# EAGLE board interface_a (EAGLE 6.3)
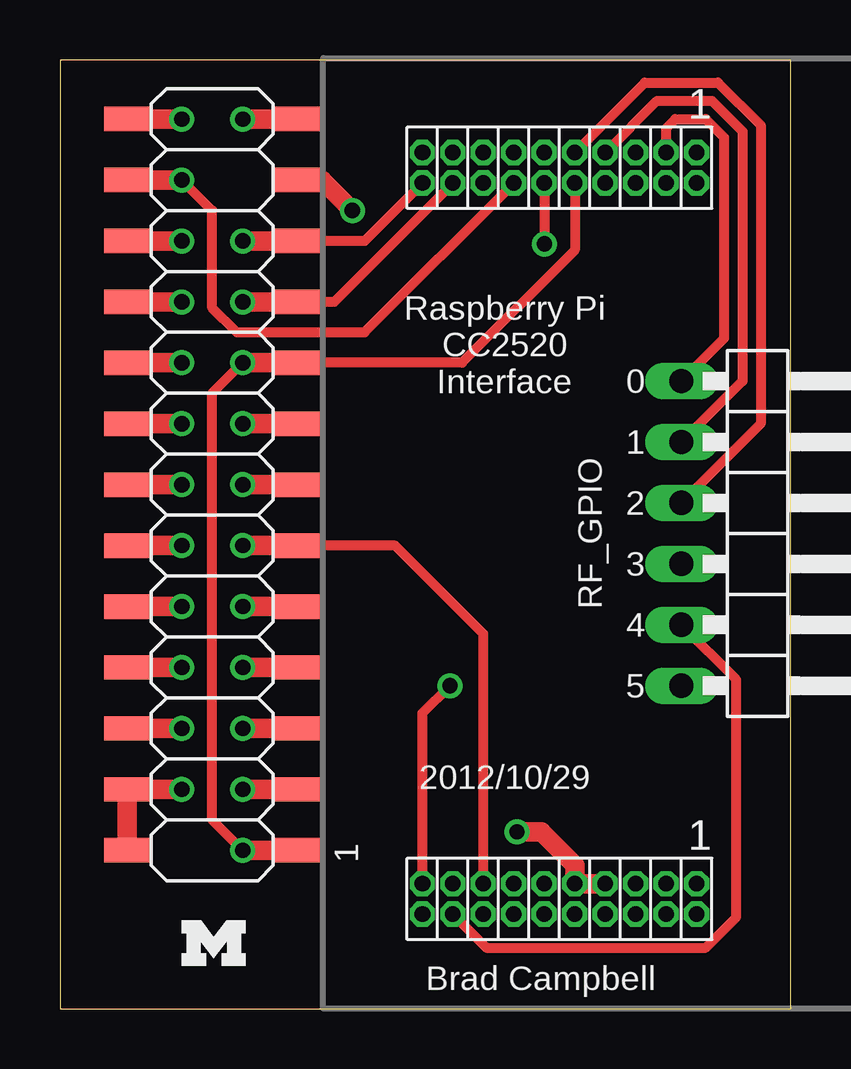
[diagram p0: board, top side]
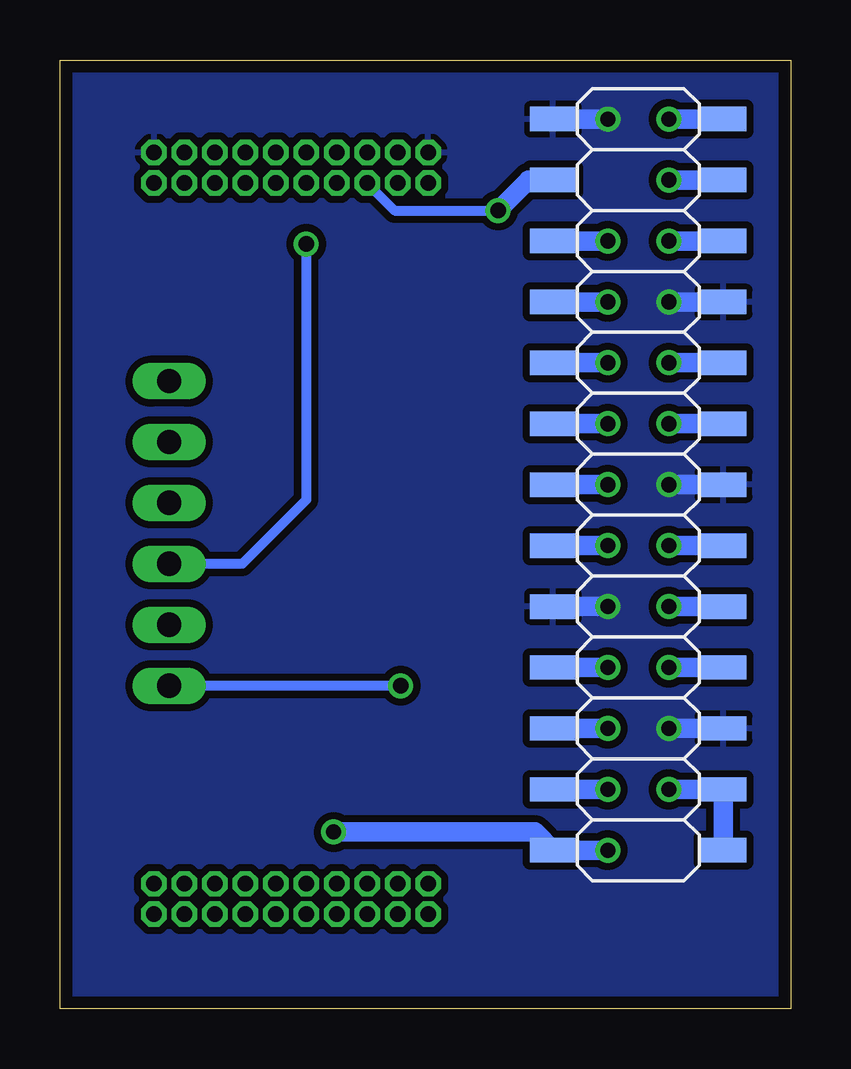
[diagram p1: board, bottom side, seen from below]

Size 30.46 x 39.55 mm. Coordinates in mm from the lower left corner, seen from the top.
Outline: 0,0 30.46,0 30.46,39.55 0,39.55 0,0
Copper layers (1*16): Top 0.0178mm / dielectric 59mil / Bottom 0.0178mm
Design rules "default *": minimum track width 6mil, minimum drill 14mil, track to track 6mil, track to pad 6mil, pad to pad 6mil, via to via 6mil, smd to smd 6mil, copper to edge 20mil, drill to drill 16mil, minimum pad ring 8mil, minimum via ring 8mil, stop-mask expansion 3mil, vias tented up to drill 25mil, thermal gap 10mil

## Footprints (pad centres in the part's own frame; a part is rotated, then mirrored left to right if it is on the bottom)
TI_CC_EVM = drill 0.65 octagon: P1_1 5.715,15.875; P1_2 5.715,14.605; P1_3 4.445,15.875; P1_4 4.445,14.605; P1_5 3.175,15.875; P1_6 3.175,14.605; P1_7 1.905,15.875; P1_8 1.905,14.605; P1_9 0.635,15.875; P1_10 0.635,14.605; P1_11 -0.635,15.875; P1_12 -0.635,14.605; P1_13 -1.905,15.875; P1_14 -1.905,14.605; P1_15 -3.175,15.875; P1_16 -3.175,14.605; P1_17 -4.445,15.875; P1_18 -4.445,14.605; P1_19 -5.715,15.875; P1_20 -5.715,14.605; P2_1 5.715,-14.605; P2_2 5.715,-15.875; P2_3 4.445,-14.605; P2_4 4.445,-15.875; P2_5 3.175,-14.605; P2_6 3.175,-15.875; P2_7 1.905,-14.605; P2_8 1.905,-15.875; P2_9 0.635,-14.605; P2_10 0.635,-15.875; P2_11 -0.635,-14.605; P2_12 -0.635,-15.875; P2_13 -1.905,-14.605; P2_14 -1.905,-15.875; P2_15 -3.175,-14.605; P2_16 -3.175,-15.875; P2_17 -4.445,-14.605; P2_18 -4.445,-15.875; P2_19 -5.715,-14.605; P2_20 -5.715,-15.875
2X13/SMD = smd 1.016 x 1.905: 1 -15.24,-3.556; 2 -15.24,3.556; 3 -12.7,-3.556; 4 -12.7,3.556; 5 -10.16,-3.556; 6 -10.16,3.556; 7 -7.62,-3.556; 8 -7.62,3.556; 9 -5.08,-3.556; 10 -5.08,3.556; 11 -2.54,-3.556; 12 -2.54,3.556; 13 0,-3.556; 14 0,3.556; 15 2.54,-3.556; 16 2.54,3.556; 17 5.08,-3.556; 18 5.08,3.556; 19 7.62,-3.556; 20 7.62,3.556; 21 10.16,-3.556; 22 10.16,3.556; 23 12.7,-3.556; 24 12.7,3.556; 25 15.24,-3.556; 26 15.24,3.556
1X06/90 = drill 1.016 long: 1 -6.35,-3.81; 2 -3.81,-3.81; 3 -1.27,-3.81; 4 1.27,-3.81; 5 3.81,-3.81; 6 6.35,-3.81

## Placement (x,y rotation side)
EVM1  CC2520EM  [TI_CC_EVM]  20.83,19.81 0 top
J1  PINHD-2X12/SMD  [2X13/SMD]  6.35,21.84 90 bottom
J2  PINHD-2X12/SMD  [2X13/SMD]  6.35,21.84 90 top
JP1  [1X06/90]  29.72,19.81 270 top
U$1  UMICH_SOLID_SMALL  [UMICH_SOLID_75MIL]  5.08,1.78 0 top

## Library data of the parts
EVM1 = brouter
J1 J2 = headers
JP1 = pinhead
U$1 = logos

## Nets
3.3V: EVM1.P1_10 EVM1.P2_7 EVM1.P2_9 J1.2 J1.18 J2.1 J2.17
5V: J1.1 J1.3 J2.2 J2.4
CE0: EVM1.P1_14 J1.23 J2.24
CE1: J1.25 J2.26
GND: EVM1.P1_1 EVM1.P1_19 J1.5 J1.10 J1.13 J1.19 J1.26 J2.6 J2.9 J2.14 J2.20 J2.25
GPIO4: J1.8 J2.7
GPIO17: EVM1.P2_15 J1.12 J2.11
GPIO18: J1.11 J2.12
GPIO22: J1.16 J2.15
GPIO23: J1.15 J2.16
GPIO24: J1.17 J2.18
GPIO25: J1.21 J2.22
GPIO27: J1.14 J2.13
MISO: EVM1.P1_20 J1.22 J2.21
MOSI: EVM1.P1_18 J1.20 J2.19
RF_GPIO0: EVM1.P1_3 JP1.1
RF_GPIO1: EVM1.P1_7 JP1.2
RF_GPIO2: EVM1.P1_9 JP1.3
RF_GPIO3: EVM1.P1_12 JP1.4
RF_GPIO4: EVM1.P2_18 JP1.5
RF_GPIO5: EVM1.P2_19 JP1.6
SCL: J1.6 J2.5
SCLK: EVM1.P1_16 J1.24 J2.23
SDA: J1.4 J2.3
UART0_RXD: J1.9 J2.10
UART0_TXD: J1.7 J2.8

## Tracks (layer width: path | path; a pad name or v marks a point on that pad's centre or on a via)
3.3V  (via drill 0.64)
  Top 0.406: EVM1.P1_10 21.46,31.62 16.76,26.92 J2.17 | v7.62,6.6 6.35,7.87 6.35,25.65 v7.62,26.92
  Top 0.813: EVM1.P2_7 EVM1.P2_9 21.46,5.97 20.07,7.37 v19.05,7.37 | J2.1 v7.62,6.6 | v7.62,26.92 J2.17
  Bottom 0.813: v7.62,26.92 J2.17 | v7.62,6.6 J2.1 10.67,7.37 v19.05,7.37
5V  (via drill 0.64)
  Top 0.813: J2.2 J2.4 v5.08,9.14
  Bottom 0.813: v5.08,9.14 J2.4 J2.2
CE0  (via drill 0.64)
  Top 0.406: EVM1.P1_14 12.7,28.19 7.37,28.19 6.35,29.21 6.35,33.27 v5.08,34.54
  Top 0.813: v5.08,34.54 J2.24
  Bottom 0.813: J2.24 v5.08,34.54
CE1  (via drill 0.64)
  Top 0.813: J2.26 v5.08,37.08
  Bottom 0.813: v5.08,37.08 J2.26
GND  (via drill 0.64)
  Top 0.813: v7.62,37.08 J2.25 | v7.62,16.76 J2.9 | J2.14 v5.08,21.84 | J2.6 v5.08,11.68 | J2.20 v5.08,29.46
  Bottom 0.813: J2.25 v7.62,37.08 | J2.9 v7.62,16.76 | v5.08,21.84 J2.14 | v5.08,11.68 J2.6 | v5.08,29.46 J2.20
  pour Bottom (isolate 0.305): 0,39.62 30.48,39.62 30.48,0 0,0
GPIO4  (via drill 0.64)
  Top 0.813: J2.7 v7.62,14.22
  Bottom 0.813: v7.62,14.22 J2.7
GPIO17  (via drill 0.64)
  Top 0.406: EVM1.P2_15 17.65,15.62 13.97,19.3 J2.11
  Top 0.813: J2.11 v7.62,19.3
  Bottom 0.813: v7.62,19.3 J2.11
GPIO18  (via drill 0.64)
  Top 0.813: v5.08,19.3 J2.12
  Bottom 0.813: J2.12 v5.08,19.3
GPIO22  (via drill 0.64)
  Top 0.813: J2.15 v7.62,24.38
  Bottom 0.813: v7.62,24.38 J2.15
GPIO23  (via drill 0.64)
  Top 0.813: v5.08,24.38 J2.16
  Bottom 0.813: J2.16 v5.08,24.38
GPIO24  (via drill 0.64)
  Top 0.813: v5.08,26.92 J2.18
  Bottom 0.813: J2.18 v5.08,26.92
GPIO25  (via drill 0.64)
  Top 0.813: J2.22 v5.08,32
  Bottom 0.813: v5.08,32 J2.22
GPIO27  (via drill 0.64)
  Top 0.813: v7.62,21.84 J2.13
  Bottom 0.813: J2.13 v7.62,21.84
MISO  (via drill 0.64)
  Top 0.406: EVM1.P1_20 12.7,32 J2.21
  Top 0.813: J2.21 v7.62,32
  Bottom 0.813: v7.62,32 J2.21
MOSI  (via drill 0.64)
  Top 0.406: EVM1.P1_18 11.43,29.46 J2.19
  Top 0.813: J2.19 v7.62,29.46
  Bottom 0.813: v7.62,29.46 J2.19
RF_GPIO0
  Top 0.406: EVM1.P1_3 25.27,36.7 25.65,37.08 26.92,37.08 27.69,36.32 27.69,27.94 JP1.1
RF_GPIO1
  Top 0.406: EVM1.P1_7 24.89,37.85 27.18,37.85 28.45,36.58 28.45,26.16 JP1.2
RF_GPIO2
  Top 0.406: EVM1.P1_9 24.38,38.61 27.43,38.61 29.21,36.83 29.21,24.38 JP1.3
RF_GPIO3  (via drill 0.64)
  Top 0.406: EVM1.P1_12 v20.19,31.88
  Bottom 0.406: JP1.4 22.86,18.54 20.19,21.21 v20.19,31.88
RF_GPIO4
  Top 0.406: EVM1.P2_18 17.78,2.54 26.92,2.54 28.19,3.81 28.19,13.72 JP1.5
RF_GPIO5  (via drill 0.64)
  Top 0.406: EVM1.P2_19 15.11,12.32 v16.26,13.46
  Bottom 0.406: v16.26,13.46 JP1.6
SCL  (via drill 0.64)
  Top 0.813: J2.5 v7.62,11.68
  Bottom 0.813: v7.62,11.68 J2.5
SCLK  (via drill 0.64)
  Top 0.813: v12.19,33.27 10.92,34.54 J2.23
  Bottom 0.406: EVM1.P1_16 16.51,33.27 v12.19,33.27 | 10.92,34.54 J2.23
  Bottom 0.813: v12.19,33.27 10.92,34.54
SDA  (via drill 0.64)
  Top 0.813: v7.62,9.14 J2.3
  Bottom 0.813: J2.3 v7.62,9.14
UART0_RXD  (via drill 0.64)
  Top 0.813: J2.10 v5.08,16.76
  Bottom 0.813: v5.08,16.76 J2.10
UART0_TXD  (via drill 0.64)
  Top 0.813: v5.08,14.22 J2.8
  Bottom 0.813: J2.8 v5.08,14.22

## Text on the board
tPlace: Raspberry Pi / CC2520 / Interface | 0 | 1 | 2 | RF_GPIO | 3 | 4 | 5 | 2012/10/29 | 1 | Brad Campbell